# Altium PCB CM5IO.PcbDoc (part 4 of 4)
Units mm, origin at the board's own origin, x right, y up, seen from the top; angles counter-clockwise.
Board outline 160 x 90 mm, 4 copper layers (F.Cu, In1.Cu, In2.Cu, B.Cu); 76 components, 212 nets, 672 pads, 703 vias.
Unrouted connection lines stored in the file: 4.
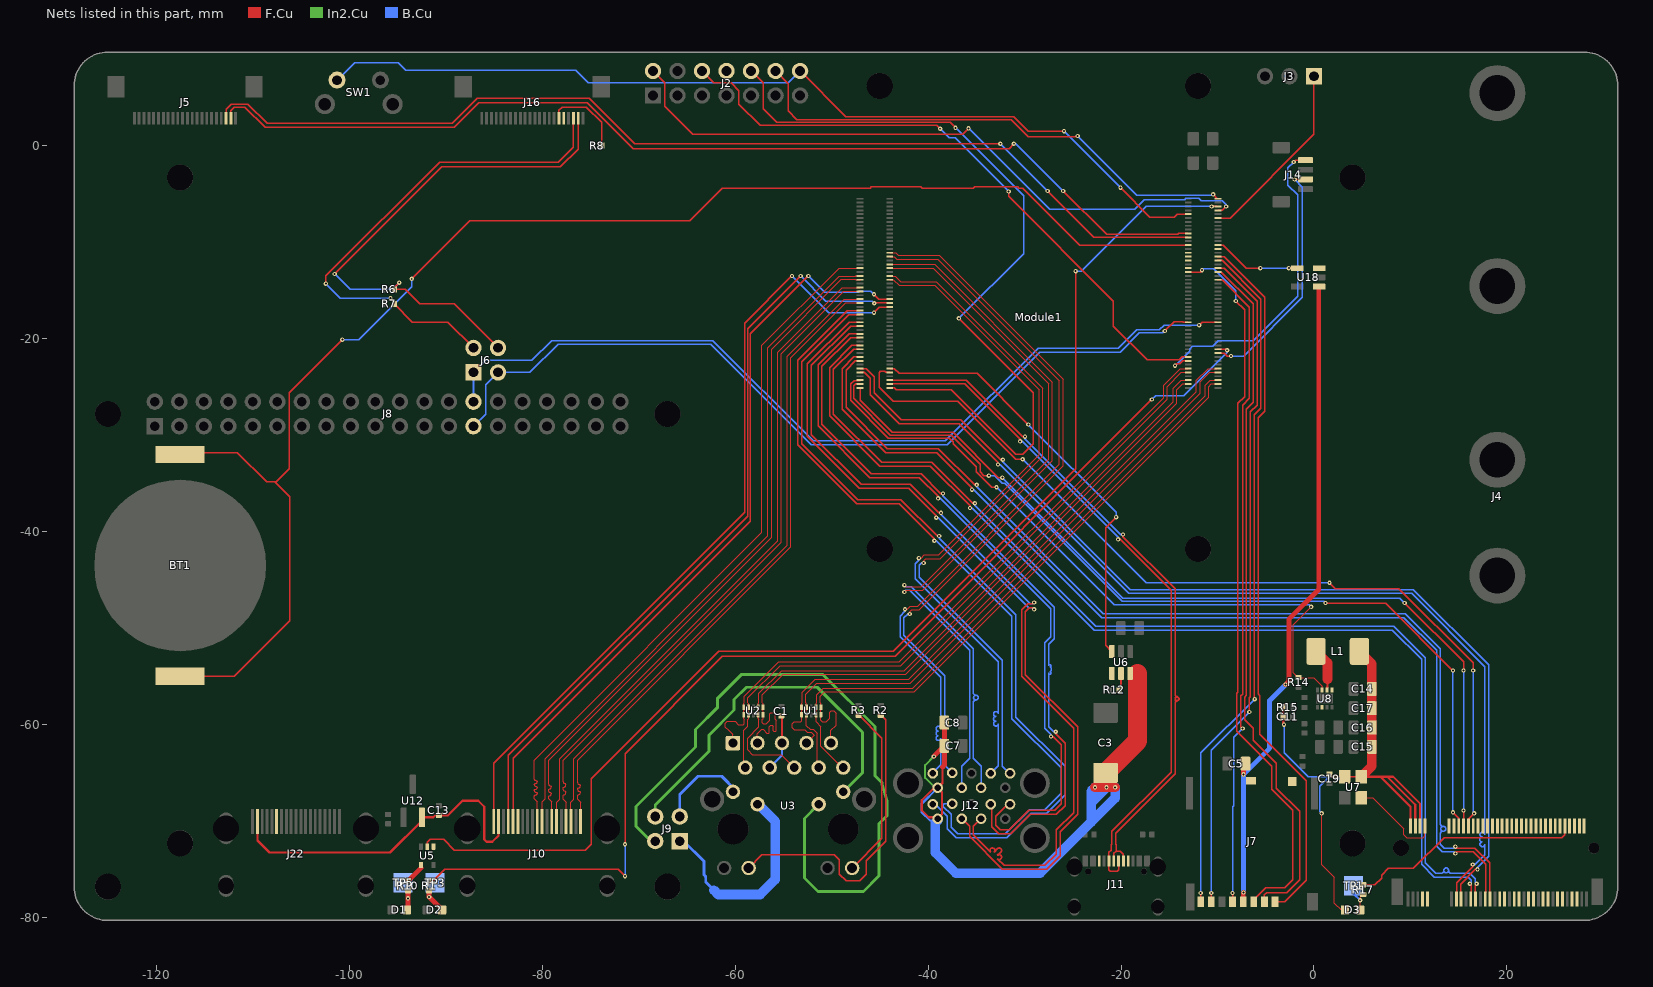
[diagram p5: the nets of this part, all layers, seen from the top]

## Via types
v1: diameter 0.45, hole 0.2, F.Cu to B.Cu, tented both sides, 703 vias

## Nets (pads, with @x,y where several pads share a name; then routed paths per layer and width w, separated by ;. In a path a pad name is that pad's centre, name@x,y a point inside that pad or via, vN(x,y) a via of type N, cw(c..) or ccw(c..) an arc to the next point about the centre after c; other vN are vias at no path point) (continued)
HDMI1_CK_P: J10.10 Module1.164 | length 73.9
  F.Cu w0.127: J10.10@-80.5,-70.02 -80.5,-68.01 -80.81,-67.7 -80.81,-67.44 -80.806,-67.407 -80.795,-67.375 -80.777,-67.346 -80.754,-67.323 -80.725,-67.305 -80.693,-67.294 -80.66,-67.29 -80.643,-67.29 -80.61,-67.286 -80.578,-67.275 -80.55,-67.257 -80.526,-67.234 -80.508,-67.205 -80.497,-67.173 -80.493,-67.14 -80.497,-67.107 -80.508,-67.075 -80.526,-67.046 -80.55,-67.023 -80.578,-67.005 -80.61,-66.994 -80.643,-66.99 -80.66,-66.99 -80.693,-66.986 -80.725,-66.975 -80.754,-66.957 -80.777,-66.934 -80.795,-66.905 -80.806,-66.873 -80.81,-66.84 -80.806,-66.807 -80.795,-66.775 -80.777,-66.746 -80.754,-66.723 -80.725,-66.705 -80.693,-66.694 -80.66,-66.69 -80.643,-66.69 -80.61,-66.686 -80.578,-66.675 -80.55,-66.657 -80.526,-66.634 -80.508,-66.605 -80.497,-66.573 -80.493,-66.54 -80.497,-66.507 -80.508,-66.475 -80.526,-66.446 -80.55,-66.423 -80.578,-66.405 -80.61,-66.394 -80.643,-66.39 -80.66,-66.39 -80.693,-66.386 -80.725,-66.375 -80.754,-66.357 -80.777,-66.334 -80.795,-66.305 -80.806,-66.273 -80.81,-66.24 -80.806,-66.207 -80.795,-66.175 -80.777,-66.146 -80.754,-66.123 -80.725,-66.105 -80.693,-66.094 -80.66,-66.09 -80.643,-66.09 -80.61,-66.086 -80.578,-66.075 -80.55,-66.057 -80.526,-66.034 -80.508,-66.005 -80.497,-65.973 -80.493,-65.94 -80.497,-65.907 -80.508,-65.875 -80.526,-65.846 -80.55,-65.823 -80.578,-65.805 -80.61,-65.794 -80.643,-65.79 -80.66,-65.79 -80.693,-65.786 -80.725,-65.775 -80.754,-65.757 -80.777,-65.734 -80.795,-65.705 -80.806,-65.673 -80.81,-65.64 -80.81,-63.679 -57.21,-40.079 -57.21,-20.679 -49.211,-12.68 -47.5,-12.68 -47.48,-12.7 Module1.164@-47,-12.7
HDMI1_D0_N: J10.9 Module1.160 | length 71.5
  F.Cu w0.127: J10.9@-80,-70.02 -80,-68.01 -79.69,-67.7 -79.69,-63.521 -56.59,-40.421 -56.59,-20.921 -49.189,-13.52 -47.5,-13.52 -47.48,-13.5 Module1.160@-47,-13.5
HDMI1_D0_P: J10.7 Module1.158 | length 71.4
  F.Cu w0.127: J10.7@-79,-70.02 -79,-68.01 -79.31,-67.7 -79.31,-67.49 -79.307,-67.462 -79.298,-67.436 -79.283,-67.412 -79.263,-67.392 -79.239,-67.377 -79.213,-67.368 -79.157,-67.362 -79.131,-67.353 -79.107,-67.338 -79.087,-67.318 -79.072,-67.294 -79.063,-67.268 -79.06,-67.24 -79.06,-67.14 -79.063,-67.112 -79.072,-67.086 -79.087,-67.062 -79.107,-67.042 -79.131,-67.027 -79.157,-67.018 -79.213,-67.012 -79.239,-67.003 -79.263,-66.988 -79.283,-66.968 -79.298,-66.944 -79.307,-66.918 -79.31,-66.89 -79.31,-66.79 -79.307,-66.762 -79.298,-66.736 -79.283,-66.712 -79.263,-66.692 -79.239,-66.677 -79.213,-66.668 -79.157,-66.662 -79.131,-66.653 -79.107,-66.638 -79.087,-66.618 -79.072,-66.594 -79.063,-66.568 -79.06,-66.54 -79.06,-66.44 -79.063,-66.412 -79.072,-66.386 -79.087,-66.362 -79.107,-66.342 -79.131,-66.327 -79.157,-66.318 -79.213,-66.312 -79.239,-66.303 -79.263,-66.288 -79.283,-66.268 -79.298,-66.244 -79.307,-66.218 -79.31,-66.19 -79.31,-63.679 -56.21,-40.579 -56.21,-21.079 -48.991,-13.86 -47.52,-13.86 -47.48,-13.9 Module1.158@-47,-13.9
HDMI1_D1_N: J10.6 Module1.154 | length 69.5
  F.Cu w0.127: J10.6@-78.5,-70.02 -78.5,-68.07 -78.19,-67.76 -78.19,-63.521 -55.59,-40.921 -55.59,-21.421 -48.909,-14.74 -47.589,-14.74 -47.549,-14.7 Module1.154@-47,-14.7
HDMI1_D1_P: J10.4 Module1.152 | length 69.4
  F.Cu w0.127: J10.4@-77.5,-70.02 -77.5,-68.07 -77.81,-67.76 -77.81,-67.39 -77.807,-67.362 -77.798,-67.336 -77.783,-67.312 -77.763,-67.292 -77.739,-67.277 -77.713,-67.268 -77.657,-67.262 -77.631,-67.253 -77.607,-67.238 -77.587,-67.218 -77.572,-67.194 -77.563,-67.168 -77.56,-67.14 -77.56,-66.99 -77.563,-66.962 -77.572,-66.936 -77.587,-66.912 -77.607,-66.892 -77.631,-66.877 -77.657,-66.868 -77.713,-66.862 -77.739,-66.853 -77.763,-66.838 -77.783,-66.818 -77.798,-66.794 -77.807,-66.768 -77.81,-66.74 -77.81,-66.59 -77.807,-66.562 -77.798,-66.536 -77.783,-66.512 -77.763,-66.492 -77.739,-66.477 -77.713,-66.468 -77.657,-66.462 -77.631,-66.453 -77.607,-66.438 -77.587,-66.418 -77.572,-66.394 -77.563,-66.368 -77.56,-66.34 -77.56,-66.19 -77.563,-66.162 -77.572,-66.136 -77.587,-66.112 -77.607,-66.092 -77.631,-66.077 -77.657,-66.068 -77.713,-66.062 -77.739,-66.053 -77.763,-66.038 -77.783,-66.018 -77.798,-65.994 -77.807,-65.968 -77.81,-65.94 -77.81,-63.679 -55.21,-41.079 -55.21,-21.579 -48.721,-15.09 -47.535,-15.09 -47.525,-15.1 Module1.152@-47,-15.1
HDMI1_D2_N: J10.3 Module1.148 | length 67.5
  F.Cu w0.127: J10.3@-77,-70.02 -77,-68.07 -76.69,-67.76 -76.69,-63.521 -54.59,-41.421 -54.59,-21.821 -48.679,-15.91 -47.535,-15.91 -47.525,-15.9 Module1.148@-47,-15.9
HDMI1_D2_P: J10.1 Module1.146 | length 67.5
  F.Cu w0.127: J10.1@-76,-70.02 -76,-68.07 -76.31,-67.76 -76.31,-67.39 -76.306,-67.358 -76.296,-67.327 -76.278,-67.3 -76.256,-67.277 -76.228,-67.26 -76.198,-67.249 -76.133,-67.242 -76.103,-67.231 -76.075,-67.214 -76.052,-67.191 -76.035,-67.164 -76.024,-67.133 -76.021,-67.101 -76.021,-67.04 -76.024,-67.008 -76.035,-66.977 -76.052,-66.95 -76.075,-66.927 -76.103,-66.91 -76.133,-66.899 -76.198,-66.892 -76.228,-66.881 -76.256,-66.864 -76.278,-66.841 -76.296,-66.814 -76.306,-66.783 -76.31,-66.751 -76.31,-66.69 -76.306,-66.658 -76.296,-66.627 -76.278,-66.6 -76.256,-66.577 -76.228,-66.56 -76.198,-66.549 -76.133,-66.542 -76.103,-66.531 -76.075,-66.514 -76.052,-66.491 -76.035,-66.464 -76.024,-66.433 -76.021,-66.401 -76.021,-66.34 -76.024,-66.308 -76.035,-66.277 -76.052,-66.25 -76.075,-66.227 -76.103,-66.21 -76.133,-66.199 -76.198,-66.192 -76.228,-66.181 -76.256,-66.164 -76.278,-66.141 -76.296,-66.114 -76.306,-66.083 -76.31,-66.051 -76.31,-63.679 -54.21,-41.579 -54.21,-21.979 -48.531,-16.3 Module1.146@-47,-16.3
HDMI1_HOTPLUG: J10.19 Module1.143 | length 81.3
  F.Cu w0.13: J10.19@-85,-70.02 -85,-64 -59,-38 -59,-18.4 v1(-54.1,-13.5) ; v1(-45.6,-17.3) -45.049,-16.749 Module1.143@-43.969,-16.749
  B.Cu w0.13: v1(-54.1,-13.5) -50.3,-17.3 v1(-45.6,-17.3)
HDMI1_SCL: J10.15 Module1.147 | length 78.8
  F.Cu w0.13: J10.15@-83,-70.02 -83,-63.5 -58.4,-38.9 -58.4,-19.5 v1(-52.4,-13.5) ; v1(-45.603,-15.403) -45.105,-15.9 Module1.147@-43.92,-15.9
  B.Cu w0.13: v1(-52.4,-13.5) -50.7,-15.2 -47.232,-15.2 -47.112,-15.08 -45.925,-15.08 v1(-45.603,-15.403)
HDMI1_SDA: J10.16 Module1.145 | length 79.5
  F.Cu w0.13: J10.16@-83.5,-70.02 -83.5,-63.2 -58.7,-38.4 -58.7,-19 v1(-53.2,-13.5) ; v1(-45.571,-16.329) -45.541,-16.3 Module1.145@-43.92,-16.3
  B.Cu w0.13: v1(-53.2,-13.5) -50.6,-16.1 -45.8,-16.1 v1(-45.571,-16.329)
HDMI_5v: C13.1 J10.18 J22.18 U12.2 | length 33.3
  F.Cu w0.23: J22.18@-109.5,-71 -109.5,-72 -108.25,-73.25 -95.75,-73.25 U12.2@-92.45,-69.95 ; U12.2@-92.41,-69.61 -91.275,-69.61 -91.05,-69.385 -89.738,-69.385 -88.253,-67.9 -86.6,-67.9 -86,-68.5 -86,-71.9 -85.75,-72.15 -85.15,-72.15 -84.5,-71.5 J10.18@-84.5,-70.8
ID_SC: J6.1 J8.28 Module1.35 | length 94
  F.Cu w0.13: v1(-11.9,-18.6) -11.6,-18.3 Module1.35@-10,-18.3
  B.Cu w0.13: J8.28@-87.11,-26.53 -87.11,-23.51 J6.1@-87.1,-23.5 ; J8.28@-87.1,-26.57 J6.1@-87.1,-23.5 ; v1(-11.9,-18.6) -15.541,-18.6 -16.015,-19.074 -18.374,-19.074 -20.3,-21 -28.6,-21 -38.2,-30.6 -51.9,-30.6 -62.3,-20.2 -79,-20.2 -81.06,-22.26 -85.86,-22.26 J6.1@-87.1,-23.5
ID_SD: J6.3 J8.27 Module1.36 | length 88.9
  F.Cu w0.13: v1(-15.453,-19.205) -14.502,-18.254 -13.611,-18.254 -13.565,-18.3 Module1.36@-13.08,-18.3
  B.Cu w0.13: J8.27@-87.11,-29.07 -85.85,-27.81 -85.85,-24.79 J6.3@-84.56,-23.5 -81.263,-23.5 -78.343,-20.58 -62.52,-20.58 -52.1,-31 -38,-31 -28.4,-21.4 -20.1,-21.4 -18.104,-19.404 -15.652,-19.404 v1(-15.453,-19.205)
M2_3v3: C11.1 C14.1 C15.1 C16.1 C17.1 C19.1 D3.2 J4.2 J4.4 J4.12 J4.14 J4.16 J4.18 J4.70 J4.72 J4.74 L1.2 R15.1 U7.1 U7.4 | length 70.4
  F.Cu w0.127: v1(0.8,-69.2) 0.8,-74.5 2.1,-75.8 2.1,-78.5 2.8,-79.2 D3.2@3.213,-79.2
  F.Cu w0.13: C19.1@1.6,-65.14 1.86,-65.4 v1(2.3,-65.4) U7.1@3.2,-65.4 U7.4@4.9,-65.4 8.2,-65.4
  F.Cu w0.23: R15.1@-3.185,-58.2 -3.185,-59.2 -3.185,-59.915 v1(-3.1,-60) ; U7.4@4.9,-65.4 6.9,-65.4 ; J4.74@10,-70.525 10,-68.5 6.9,-65.4 ; J4.72@10.5,-70.525 10.5,-68.3 7.6,-65.4 ; J4.70@11,-70.525 11,-68.2 8.2,-65.4 7.6,-65.4 ; 6.9,-65.4 7.6,-65.4
  F.Cu w1: L1.2@4.7,-52.4 6,-53.7 6,-54.1 C15.1@6,-62.3 6,-64.3 U7.4@4.9,-65.4
  B.Cu w0.13: v1(-3.1,-60) -3.1,-62.9 -0.6,-65.4 v1(2.3,-65.4) 1.6,-65.4 0.6,-66.4 0.6,-69 v1(0.8,-69.2)
Net-(C1-Pad1): C1.1 U3.4 U3.5 | length 5.8
  F.Cu w0.23: U3.5@-55.135,-61.91 C1.1@-55.135,-59.145
  B.Cu w0.23: U3.4@-56.405,-64.45 -55.135,-63.18 U3.5@-55.135,-61.91
Net-(D1-K): D1.1 R10.1 TP5.1 | length 3
  F.Cu w0.5: D1.1@-93.9,-79.087 v1(-93.9,-78) R10.1@-93.9,-77.185
  B.Cu w0.23: v1(-93.9,-78) TP5.1@-93.9,-76.9
Net-(D2-K): D2.1 R1.1 TP3.1 | length 3.4
  F.Cu w0.5: R1.1@-91.7,-77.185 v1(-91.7,-77.862) D2.1@-90.362,-79.2
  B.Cu w0.23: v1(-91.7,-77.862) TP3.1@-91.7,-77.012
Net-(D3-K): D3.1 R17.1 TP1.1 | length 2.7
  F.Cu w0.127: D3.1@4.788,-79.2 4.788,-77.897 R17.1@5.1,-77.585
  B.Cu w0.23: TP1.1@4.1,-77.512 v1(4.788,-78.2)
Net-(J4-DAS{slash}{\D\S\S\}\{\s\l\a\s\h\}\{LED1}): J4.10 R17.2 | length 24.1
  F.Cu w0.13: R17.2@5.1,-76.615 6.285,-76.615 7,-75.9 7,-75.6 7.7,-74.9 10.3,-74.9 13.5,-71.7 25.7,-71.7 26,-71.4 J4.10@26,-70.525
Net-(J4-SUSCLK): J4.68 U7.3 | length 9.7
  F.Cu w0.127: U7.3@4.9,-67.6 6.1,-67.6 9.3,-70.8 9.3,-71.4 9.6,-71.7 11.3,-71.7 11.5,-71.5 J4.68@11.5,-70.525
Net-(J16-Pin_17): J16.17 R8.2 | length 8.5
  F.Cu w0.13: J16.17@-78.25,2.85 -78.25,3.65 -77.9,4 -75.4,4 -73.8,2.4 R8.2@-73.8,0
Net-(Module1A-LED_nACT): Module1.21 R1.2 | length 114.7
  F.Cu w0.13: R1.2@-91.7,-76.215 -91.315,-76.215 -90.1,-75 -72.1,-75 v1(-71.4,-75.7) ; v1(-71.4,-72.4) -71.4,-63 -61.3,-52.9 -43.4,-52.9 v1(-16.8,-26.3) ; Module1.21@-10,-21.1 -9.1,-21.1 v1(-9,-21.2)
  B.Cu w0.13: v1(-71.4,-75.7) v1(-71.4,-72.4) ; v1(-16.8,-26.3) -16.4,-25.9 -13.5,-25.9 -9,-21.4 v1(-9,-21.2)
Net-(R10-Pad2): R10.2 U5.4 | length 2.2
  F.Cu w0.23: U5.4@-92.55,-74.865 U5.4@-92.55,-74.55
  F.Cu w0.5: R10.2@-93.9,-76.215 U5.4@-92.55,-74.865
Net-(U3-LEDG_K): R3.1 U3.18 | length 18.1
  F.Cu w0.13: U3.18@-47.87,-74.86 -44.8,-71.79 -44.8,-61.4 R3.1@-47.2,-59
Net-(U3-LEDY_K): R2.1 U3.16 | length 32.6
  F.Cu w0.13: U3.16@-58.59,-74.86 -57.23,-73.5 -49.7,-73.5 -49.2,-74 -49.2,-75.5 -48.5,-76.2 -47.1,-76.2 -46.4,-75.5 -46.4,-74.1 -44.4,-72.1 -44.4,-59.5 R2.1@-44.9,-59
Net-(U6-ILIM): R12.1 U6.5 | length 3.3
  F.Cu w0.13: R12.1@-20,-56.185 U6.5@-20,-54.7
  F.Cu w0.23: R12.1@-20.19,-56.4 -20,-56.21 U6.5@-20,-54.7
Net-(U8-LX): L1.1 U8.6 | length 4.5
  F.Cu w0.23: U8.6@1.35,-56.4 1.35,-56.15 1.4,-56.1 1.4,-55.3
  F.Cu w1: L1.1@0.2,-52.4 1.4,-53.6 1.4,-55.3
nPWR_LED: Module1.95 U5.2 | length 126.6
  F.Cu w0.13: U5.2@-91.9,-72.65 -91.9,-72.195 -91.605,-71.9 -90.2,-71.9 -89.1,-73 -75.5,-73 -74.9,-72.4 -74.9,-65.6 -61.7,-52.4 -43.6,-52.4 -24.7,-33.5 v1(-24.7,-13) ; v1(-10.6,-6.3) Module1.95@-10,-6.3
  B.Cu w0.13: v1(-24.7,-13) -24.1,-13 -17.4,-6.3 -12.579,-6.3 -12.574,-6.305 -12.226,-6.305 -12.221,-6.3 v1(-10.6,-6.3)
nRPIBOOT: J2.2 Module1.93 | length 69.2
  F.Cu w0.13: J2.2@-68.5,7.74 -67.26,6.5 -67.26,4.06 -64.4,1.2 -36.4,1.2 v1(-35.8,1.8) ; Module1.93@-9.96,-6.7 -9.5,-6.7 v1(-9.1,-6.3)
  B.Cu w0.13: v1(-35.8,1.8) -27.4,-6.6 -18.6,-6.6 -17.6,-5.6 -13.4,-5.6 -13.265,-5.465 -11.935,-5.465 -11.7,-5.7 -9.5,-5.7 -9.1,-6.1 v1(-9.1,-6.3)
PCIE_CLK_N: J4.53 Module1.112 | length 103.8
  F.Cu w0.147: Module1.112@-47,-23.1 -46.425,-23.1 -45.575,-23.95 -45.575,-25.625 -42.8,-28.4 -36.617,-28.4 -32.466,-32.551 v1(-32.251,-32.551) ; J4.53@15.2,-77.4 15.2,-76.533 16.734,-74.999 v1(16.949,-74.999)
  B.Cu w0.147: v1(-32.251,-32.551) -32.251,-32.766 -19.017,-46 10.283,-46 18.1,-53.817 18.1,-73.633 16.949,-74.784 v1(16.949,-74.999)
PCIE_CLK_P: J4.55 Module1.110 | length 105.4
  F.Cu w0.147: Module1.110@-47,-23.5 -46.6,-23.5 -45.975,-24.125 -45.975,-25.825 -43,-28.8 -36.783,-28.8 -32.749,-32.834 v1(-32.749,-33.049) ; J4.55@14.8,-77.4 14.8,-76.367 16.451,-74.716 v1(16.451,-74.501)
  B.Cu w0.147: v1(-32.749,-33.049) -32.534,-33.049 -19.183,-46.4 10.117,-46.4 17.7,-53.983 17.7,-71.4 ccw(c17.45,-71.4) 17.45,-71.65 17.411,-71.65 ccw(c17.411,-71.9) 17.161,-71.9 ccw(c17.411,-71.9) 17.411,-72.15 17.45,-72.15 ccw(c17.45,-72.4) 17.7,-72.4 17.7,-73.467 16.666,-74.501 v1(16.451,-74.501)
PCIE_nCLKREQ: J4.52 Module1.102 | length 92.1
  F.Cu w0.13: Module1.102@-47,-25.1 -47,-26.4 -43.7,-29.7 -37.4,-29.7 -32.7,-34.4 v1(-32.3,-34.4) ; v1(9.4,-47.4) 15.5,-53.5 v1(15.5,-54.4) ; J4.52@15.5,-70.525 v1(15.5,-68.9)
  B.Cu w0.13: v1(-32.3,-34.4) -19.8,-46.9 8.9,-46.9 v1(9.4,-47.4) ; v1(15.5,-68.9) v1(15.5,-54.4)
PCIE_nRST: J4.50 Module1.109 | length 93.4
  F.Cu w0.13: v1(1.6,-45.3) 2.2,-45.9 8.8,-45.9 16.5,-53.6 v1(16.5,-54.4) ; J4.50@16,-70.525 16,-69.8 v1(16.6,-69.2)
  F.Cu w0.147: Module1.109@-43.92,-23.5 -44.375,-23.5 -44.475,-23.4 -44.925,-23.4 -45.075,-23.55 -45.075,-25.025 -43.6,-26.5 -36.9,-26.5 -30.9,-32.5 v1(-30.2,-32.5)
  B.Cu w0.13: -2,-45.3 v1(1.6,-45.3) ; v1(16.5,-54.4) 16.5,-67.9 16.515,-67.915 16.515,-69.115 v1(16.6,-69.2)
  B.Cu w0.147: v1(-30.2,-32.5) -17.4,-45.3 -2,-45.3
PCIE_nWAKE: J4.54 Module1.104 | length 92.7
  F.Cu w0.13: Module1.104@-47.04,-24.7 -47.5,-24.7 -47.7,-24.9 -47.7,-26.2 -43.9,-30 -37.6,-30 -34.6,-33 -34.6,-33.8 -34.2,-34.2 v1(-33.7,-34.2) ; v1(1.2,-47.4) 1.22,-47.42 7.42,-47.42 v1(14.4,-54.4) ; v1(14.4,-69.1) 15,-69.7 J4.54@15,-70.525
  B.Cu w0.13: v1(-33.7,-34.2) -33.1,-34.2 -32.3,-35 -32.061,-35 -19.861,-47.2 1,-47.2 v1(1.2,-47.4) ; v1(14.4,-69.1) v1(14.4,-54.4)
PCIE_PWR_EN: Module1.106 R14.1 U8.7 | length 71.3
  F.Cu w0.127: R14.1@-1.67,-55.13 -2.156,-54.644 -2.156,-49.656 v1(-0.3,-47.8) ; R14.1@-1.6,-55.13 -0.043,-55.13 0.85,-56.023 U8.7@0.85,-56.4
  F.Cu w0.13: Module1.106@-47.04,-24.3 -47.085,-24.345 -47.645,-24.345 -48,-24.7 -48,-26.4 -44.1,-30.3 -37.8,-30.3 -37.4,-30.7 -37.4,-30.9 -35,-33.3 -35,-33.8 -33.4,-35.4 v1(-32.9,-35.4)
  B.Cu w0.13: v1(-32.9,-35.4) -20.7,-47.6 -0.5,-47.6 v1(-0.3,-47.8)
PCIE_RX_N: J4.43 Module1.118 | length 107.9
  F.Cu w0.147: Module1.118@-47.04,-21.9 -47.683,-21.9 -48.9,-23.117 -48.9,-27.3 -44.4,-31.8 -39.089,-31.8 -35.45,-35.44 v1(-35.45,-35.654) ; v1(14.643,-73.351) 14.795,-73.2 16.517,-73.2 17.8,-74.483 J4.43@17.8,-77.4
  B.Cu w0.147: v1(-35.45,-35.654) -35.236,-35.654 -21.989,-48.9 9.317,-48.9 12.7,-52.283 12.7,-72.583 13.317,-73.2 14.492,-73.2 v1(14.643,-73.351)
PCIE_RX_P: J4.41 Module1.116 | length 109.4
  F.Cu w0.147: Module1.116@-47.04,-22.3 -47.517,-22.3 -48.5,-23.283 -48.5,-27.1 -44.2,-31.4 -38.924,-31.4 -35.167,-35.157 v1(-34.953,-35.157) ; v1(14.643,-72.648) 14.795,-72.8 16.683,-72.8 18.2,-74.317 J4.41@18.2,-77.4
  B.Cu w0.147: v1(-34.953,-35.157) -34.953,-35.371 -21.824,-48.5 9.483,-48.5 13.1,-52.117 13.1,-70.3 ccw(c13.35,-70.3) 13.35,-70.55 13.396,-70.55 ccw(c13.396,-70.8) 13.646,-70.8 ccw(c13.396,-70.8) 13.396,-71.05 13.35,-71.05 ccw(c13.35,-71.3) 13.1,-71.3 13.1,-72.417 13.483,-72.8 14.492,-72.8 v1(14.643,-72.648)
PCIE_TX_N: J4.49 Module1.124 | length 109.5
  F.Cu w0.147: Module1.124@-47.04,-20.7 -47.883,-20.7 -50.2,-23.017 -50.2,-27.983 -44.983,-33.2 -39.788,-33.2 -35.649,-37.339 v1(-35.649,-37.554) ; v1(16.149,-76.493) 16.3,-76.644 J4.49@16.3,-77.4
  B.Cu w0.147: v1(-35.649,-37.554) -35.435,-37.554 -22.788,-50.2 8.117,-50.2 11.15,-53.233 11.15,-74.483 12.467,-75.8 15.967,-75.8 16.3,-76.133 16.3,-76.341 v1(16.149,-76.493)
PCIE_TX_P: J4.47 Module1.122 | length 111.1
  F.Cu w0.147: Module1.122@-47.04,-21.1 -47.717,-21.1 -49.8,-23.183 -49.8,-27.817 -44.817,-32.8 -39.623,-32.8 -35.366,-37.056 v1(-35.152,-37.056) ; J4.47@16.7,-77.4 16.7,-76.644 v1(16.852,-76.493)
  B.Cu w0.147: v1(-35.152,-37.056) -35.152,-37.271 -22.623,-49.8 8.283,-49.8 11.55,-53.067 11.55,-74.317 12.633,-75.4 12.65,-75.4 13.2,-75.4 ccw(c13.2,-75.15) 13.45,-75.15 13.45,-75.104 ccw(c13.7,-75.104) 13.7,-74.854 ccw(c13.7,-75.104) 13.95,-75.104 13.95,-75.15 ccw(c14.2,-75.15) 14.2,-75.4 16.133,-75.4 16.7,-75.967 16.7,-76.341 v1(16.852,-76.493)
PMIC_ENABLE: J2.12 Module1.99 | length 53.1
  F.Cu w0.13: J2.12@-55.8,7.74 -54.5,6.44 -54.5,3.6 -53.6,2.7 -31.4,2.7 -29.6,0.9 -24.6,0.9 v1(-24.5,1) ; v1(-10.45,-5.05) Module1.99@-10,-5.5
  B.Cu w0.13: v1(-24.5,1) -18.38,-5.12 -10.52,-5.12 v1(-10.45,-5.05)
PWM: J14.2 Module1.19 | length 25.1
  F.Cu w0.13: Module1.19@-9.96,-21.5 -9.294,-21.5 -8.994,-21.8 v1(-8.6,-21.8) ; v1(-2,-3.5) J14.2@-0.875,-3.5
  B.Cu w0.13: v1(-8.6,-21.8) -7.3,-21.8 -1.2,-15.7 -1.2,-4.3 v1(-2,-3.5)
PWR_BUT: J2.14 Module1.92 SW1.1 | length 96.7
  F.Cu w0.13: J2.14@-53.26,7.74 -48.52,3 -31.1,3 -29.6,1.5 v1(-25.9,1.5) ; v1(-20.05,-4.35) -17,-7.4 -14.47,-7.4 -14.17,-7.1 Module1.92@-13.08,-7.1
  B.Cu w0.13: SW1.1@-101.25,6.8 -101.2,6.8 -99.4,8.6 -94.9,8.6 -94.1,7.8 -76.5,7.8 -75.2,6.5 -54.5,6.5 J2.14@-53.26,7.74 ; v1(-25.9,1.5) v1(-20.05,-4.35)
SCL0: J5.20 Module1.80 | length 108.7
  F.Cu w0.13: J5.20@-112.75,2.85 -112.75,3.75 -112.2,4.3 -110.5,4.3 -108.5,2.3 -89.3,2.3 -86.7,4.9 -75.1,4.9 -70.4,0.2 v1(-32.5,0.2) ; v1(-27.6,-4.7) -22.8,-9.5 Module1.80@-13.08,-9.5
  B.Cu w0.13: v1(-32.5,0.2) v1(-27.6,-4.7)
SCL1: J6.2 J16.20 R7.2 | length 52.9
  F.Cu w0.13: v1(-102.4,-14.3) -102.4,-13.5 -90.6,-1.7 -78.3,-1.7 -76.75,-0.15 J16.20@-76.75,2.85 ; v1(-95.7,-15.8) R7.2@-95.33,-16.17 ; R7.2@-95.33,-16.4 -93.43,-18.3 -89.76,-18.3 J6.2@-87.1,-20.96
  B.Cu w0.13: v1(-102.4,-14.3) -100.9,-15.8 v1(-95.7,-15.8)
SD_CLK: J7.5 Module1.57 | length 67
  F.Cu w0.13: Module1.57@-10,-13.9 -9.53,-13.9 -6.7,-16.73 -6.7,-26.2 -7.4,-26.9 -7.4,-56.845 -7.58,-57.025 -7.58,-60.22 v1(-7.4,-60.4) ; v1(-8.45,-77.45) -8.44,-77.46 J7.5@-8.44,-78.375
  B.Cu w0.13: v1(-8.45,-77.45) -8.4,-77.4 -8.4,-68.5 -8.3,-68.4 -8.3,-61.3 v1(-7.4,-60.4)
SD_CMD: J7.3 Module1.62 | length 75.2
  F.Cu w0.13: Module1.62@-13.08,-13.1 -11.8,-13.1 v1(-11.6,-12.9) ; v1(-8.1,-16.1) -7.2,-17 -7.2,-26 -7.9,-26.7 -7.9,-56.65 -8,-56.75 -8,-60.7 -4.4,-64.3 -4.4,-66.7 -2.2,-68.9 -2.2,-76.1 -3.017,-76.917 -4.982,-76.917 J7.3@-6.24,-78.175
  B.Cu w0.13: v1(-11.6,-12.9) -11.44,-12.74 -10.392,-12.74 -8.1,-15.032 v1(-8.1,-16.1)
SD_DAT0: J7.7 Module1.63 | length 69.8
  F.Cu w0.13: v1(-10.65,-77.45) -10.64,-77.46 J7.7@-10.64,-78.375 ; Module1.63@-10,-12.7 -9.3,-12.7 -5.9,-16.1 -5.9,-26.9 -6.6,-27.6 -6.6,-57.1 -6.7,-57.2 v1(-6.7,-58.694)
  B.Cu w0.13: v1(-10.65,-77.45) -10.65,-62.65 -6.7,-58.7 v1(-6.7,-58.694)
SD_DAT1: J7.8 Module1.67 | length 71.3
  F.Cu w0.13: J7.8@-11.74,-78.375 v1(-11.74,-77.45) ; Module1.67@-10,-11.9 -9.5,-11.9 -5.5,-15.9 -5.5,-27.2 -6.2,-27.9 -6.2,-57.3 v1(-6.14,-57.36)
  B.Cu w0.13: v1(-11.74,-77.45) -11.74,-62.94 -6.16,-57.36 v1(-6.14,-57.36)
SD_DAT2: J7.1 Module1.69 | length 73.6
  F.Cu w0.13: Module1.69@-10,-11.5 -9.3,-11.5 -5.1,-15.7 -5.1,-27.5 -5.8,-28.2 -5.8,-56.8 -5.6,-57 -5.6,-61 -0.8,-65.8 -0.8,-76.15 -3.025,-78.375 J7.1@-4.04,-78.375
SD_DAT3: J7.2 Module1.61 | length 72.5
  F.Cu w0.13: Module1.61@-10,-13.1 -9.6,-13.1 -6.3,-16.4 -6.3,-26.6 -7,-27.3 -7,-56.979 -7.2,-57.179 -7.2,-59.5 -6.3,-60.4 -6.3,-61.6 -3.9,-64 -3.9,-66.6 -1.5,-69 -1.5,-76.1 -2.8,-77.4 -4.9,-77.4 -5.14,-77.64 J7.2@-5.14,-78.375
SD_PWR: C5.1 J7.4 U18.1 | length 67.9
  F.Cu w0.5: J7.4@-7.34,-78.375 -7.34,-77.44 v1(-7.3,-77.4) ; v1(-7.3,-65.15) C5.1@-7.3,-64.237 ; v1(-2.95,-55.85) -2.6,-55.5 -2.6,-49.1 0.5,-46 U18.1@0.5,-14.6
  B.Cu w0.5: v1(-7.3,-77.4) v1(-7.3,-65.15) -4.6,-62.45 -4.6,-57.5 v1(-2.95,-55.85)
SD_PWR_ON: Module1.75 U18.4 | length 9.3
  F.Cu w0.13: Module1.75@-10,-10.3 -9.4,-10.3 -7,-12.7 v1(-5.555,-12.7) ; v1(-2.6,-12.7) U18.4@-1.7,-12.7
  B.Cu w0.13: v1(-5.555,-12.7) v1(-2.6,-12.7)
SDA0: J5.21 Module1.82 | length 108.1
  F.Cu w0.13: J5.21@-112.25,2.85 -112.25,3.63 -111.88,4 -110.8,4 -108.7,1.9 -89.1,1.9 -86.54,4.46 -75.316,4.46 -70.556,-0.3 -31.6,-0.3 v1(-31.1,0.2) ; v1(-26,-4.7) -21.5,-9.2 -20.5,-9.2 -20.495,-9.195 -14.112,-9.195 -14.017,-9.1 Module1.82@-13.08,-9.1
  B.Cu w0.13: v1(-31.1,0.2) -30.9,0.2 v1(-26,-4.7)
SDA1: J6.4 J16.21 R6.2 | length 55.5
  F.Cu w0.13: v1(-101.5,-13.3) -90.4,-2.2 -78.1,-2.2 -76.25,-0.35 J16.21@-76.25,2.85 ; R6.2@-95.33,-14.9 -94.2,-14.9 -92.7,-16.4 -89.12,-16.4 J6.4@-84.56,-20.96 ; R6.2@-95.33,-14.73 v1(-94.8,-14.2)
  B.Cu w0.13: v1(-101.5,-13.3) -99.9,-14.9 -95.5,-14.9 v1(-94.8,-14.2)
SYNC_OUT: J2.6 Module1.18 | length 65.5
  F.Cu w0.13: J2.6@-63.42,7.74 -62.18,6.5 -60.4,6.5 -59.6,5.7 -59.6,4.3 -57.4,2.1 -39.1,2.1 v1(-38.75,1.75) ; v1(-31.65,-4.75) -31.65,-5.25 -20.8,-16.1 -20.8,-18.7 -17.3,-22.2 -13.974,-22.2 -13.674,-21.9 Module1.18@-13.08,-21.9
  B.Cu w0.13: v1(-38.75,1.75) -37.8,0.8 -37.2,0.8 v1(-31.65,-4.75)
TACHO: J14.4 Module1.16 | length 33.2
  F.Cu w0.13: v1(-14.4,-22.8) -14.2,-22.6 -13.907,-22.6 -13.607,-22.3 Module1.16@-13.08,-22.3 ; v1(-2.1,-1.7) -1.9,-1.5 J14.4@-0.875,-1.5
  B.Cu w0.13: v1(-14.4,-22.8) -12.9,-21.3 -12.9,-21.1 -12.6,-20.8 -10.5,-20.8 -9.9,-20.2 -6.3,-20.2 -1.7,-15.6 -1.7,-5.1 -2.7,-4.1 -2.7,-2.3 v1(-2.1,-1.7)
TR0_TAP: J9.3 U3.11 | length 9.4
  B.Cu w0.3: J9.3@-65.73,-69.53 -65.73,-67.23 -63.85,-65.35 -61.381,-65.35 U3.11@-59.988,-66.743
TR1_TAP: J9.1 U3.12 | length 22.3
  B.Cu w0.3: J9.1@-65.73,-72.07 -65.33,-72.07 -63.2,-74.2 -63.2,-75.6 -63.03,-75.77 -63.03,-76.32 -62.2,-77.15
  B.Cu w1: -62.2,-77.15 -61.75,-77.6 -57.4,-77.6 -55.85,-76.05 -55.85,-70 U3.12@-57.45,-68.4
TR2_TAP: J9.2 U3.13 | length 72.4
  In2.Cu w0.3: J9.2@-68.27,-72.07 -68.73,-72.07 -70.27,-70.53 -70.27,-68.489 -64.1,-62.319 -64.1,-60.5 -61.8,-58.2 -61.8,-57.262 -59.363,-54.825 -50.875,-54.825 -45.5,-60.2 -45.5,-65.3 -44.77,-66.03 -44.77,-66.211 -44.225,-67.933 -44.225,-69.425 -45.1,-70.3 -45.1,-75.7 -46.7,-77.3 -51.4,-77.3 -52.8,-75.9 -52.8,-69.715 U3.13@-51.325,-68.24
TR3_TAP: J9.4 U3.14 | length 38.3
  In2.Cu w0.3: J9.4@-68.27,-69.53 -68.27,-68.328 -62.7,-62.758 -62.7,-61.1 -60.1,-58.5 -60.1,-57.4 -58.825,-56.125 -51.475,-56.125 -46.8,-60.8 -46.8,-64.985 U3.14@-48.785,-66.97
TRD0_N: Module1.10 U2.4 U2.7 U3.2 | length 67.5
  F.Cu w0.127: U3.2@-59.1,-64.295 -59.1,-60.6 -58.66,-60.16 -58.66,-59.442 -58.6,-59.382 U2.7@-58.6,-58.97 -58.6,-58.557 -58.66,-58.497 U2.4@-58.66,-58.385 ; U2.4@-58.6,-58.2 -58.6,-57.787 -58.66,-57.727 -58.66,-57.229 -55.321,-53.89 -42.821,-53.89 -15.21,-26.279 -15.21,-24.979 -13.731,-23.5 Module1.10@-13.04,-23.5
TRD0_P: Module1.12 U2.5 U2.6 U3.1 | length 68.2
  F.Cu w0.127: U3.1@-60.215,-61.91 -60.215,-61.015 -60.68,-60.55 -60.7,-60.55 -61,-60.25 -61,-59.85 -60.8,-59.65 -60,-59.65 -59.65,-60 -59.15,-60 -59.04,-59.89 -59.04,-59.84 -59.04,-59.442 -59.1,-59.382 U2.6@-59.1,-58.97 -59.1,-58.557 -59.04,-58.497 U2.5@-59.04,-58.385 ; U2.5@-59.1,-58.2 -59.1,-57.787 -59.04,-57.727 -59.04,-57.071 -55.479,-53.51 -42.979,-53.51 -15.59,-26.121 -15.59,-24.821 -13.869,-23.1 Module1.12@-13.04,-23.1
TRD1_N: Module1.6 U2.2 U2.9 U3.6 | length 70.5
  F.Cu w0.127: U2.2@-57.6,-58.2 -57.6,-57.787 -57.54,-57.727 -57.54,-56.771 -55.179,-54.41 -42.479,-54.41 -14.59,-26.521 -14.59,-25.121 -13.779,-24.31 -13.615,-24.31 -13.605,-24.3 Module1.6@-13.08,-24.3 ; U2.2@-57.54,-58.385 -57.54,-58.497 -57.6,-58.557 U2.9@-57.6,-58.97 -57.6,-59.382 -57.54,-59.442 -57.54,-60.24 -58.7,-61.4 -58.7,-62.6 -58.2,-63.1 -55.215,-63.1 U3.6@-53.865,-64.45
TRD1_P: Module1.4 U2.1 U2.10 U3.3 | length 69.7
  F.Cu w0.127: U3.3@-57.675,-61.91 -57.675,-60.925 -57.25,-60.5 -57.1,-60.5 -56.7,-60.9 -56.5,-60.9 -56.45,-60.85 -56.45,-60.2 -56.3,-60.05 -56.15,-60.05 -56.05,-60.15 -56.05,-60.65 -56,-60.7 -55.85,-60.7 -55.8,-60.7 -55.75,-60.65 -55.75,-59.55 -55.85,-59.45 -55.85,-58.85 -55.95,-58.75 -56.3,-58.75 -56.4,-58.85 -56.4,-59.55 -56.75,-59.9 -57.05,-59.9 -57.16,-59.79 -57.16,-59.442 -57.1,-59.382 U2.10@-57.1,-58.97 -57.1,-58.557 -57.16,-58.497 U2.1@-57.16,-58.385 ; U2.1@-57.1,-58.2 -57.1,-57.787 -57.16,-57.727 -57.16,-56.929 -55.021,-54.79 -42.321,-54.79 -14.21,-26.679 -14.21,-25.279 -13.621,-24.69 -13.615,-24.69 -13.605,-24.7 Module1.4@-13.08,-24.7
TRD2_N: Module1.9 U1.4 U1.7 U3.8 | length 65.1
  F.Cu w0.127: U1.4@-52.66,-58.385 -52.66,-58.497 -52.6,-58.557 U1.7@-52.6,-58.97 -52.6,-60.1 -52.2,-60.5 -51.9,-60.5 -51.5,-60.9 U3.8@-51.5,-64.275 ; U1.4@-52.6,-58.2 -52.6,-57.787 -52.66,-57.727 -52.66,-56.829 -51.521,-55.69 -41.821,-55.69 -11.81,-25.679 -11.81,-24.479 -10.821,-23.49 -10.535,-23.49 -10.525,-23.5 Module1.9@-10,-23.5
TRD2_P: Module1.11 U1.5 U1.6 U3.7 | length 65.7
  F.Cu w0.127: U1.5@-53.1,-58.2 -53.1,-57.787 -53.04,-57.727 -53.04,-56.671 -51.679,-55.31 -41.979,-55.31 -12.19,-25.521 -12.19,-24.321 -10.979,-23.11 -10.535,-23.11 -10.525,-23.1 Module1.11@-10,-23.1 ; U1.5@-53.04,-58.385 -53.04,-58.497 -53.1,-58.557 U1.6@-53.1,-58.97 -53.1,-59.6 -53.2,-59.7 -53.85,-59.7 -54.05,-59.9 -54.05,-60.35 -53.85,-60.55 -52.75,-60.55 -52.5,-60.8 -52.1,-60.8 -51.8,-61.1 -51.8,-61.115 U3.7@-52.595,-61.91
TRD3_N: Module1.5 U1.2 U1.9 U3.10 | length 64.2
  F.Cu w0.127: U1.2@-51.6,-58.2 -51.6,-57.787 -51.54,-57.727 -51.54,-56.888 -50.862,-56.21 -41.579,-56.21 -11.29,-25.921 -11.29,-24.821 -10.769,-24.3 Module1.5@-10,-24.3 ; U1.2@-51.54,-58.385 -51.54,-58.497 -51.6,-58.557 U1.9@-51.6,-58.97 -51.6,-59.7 -51.1,-60.2 -51.1,-62.264 U3.10@-48.914,-64.45
TRD3_P: Module1.3 U1.1 U1.10 U3.9 | length 63.5
  F.Cu w0.127: U1.1@-51.16,-58.385 -51.16,-58.497 -51.1,-58.557 U1.10@-51.1,-58.97 -51.1,-59.55 -50.95,-59.7 -50.55,-59.7 -50.2,-59.35 -50.2,-58.7 -50.05,-58.55 -49.75,-58.55 -49.5,-58.8 -49.5,-60.05 -50.055,-60.605 U3.9@-50.055,-61.91 ; U1.1@-51.1,-58.2 -51.1,-57.787 -51.16,-57.727 -51.16,-57.046 -50.704,-56.59 -41.421,-56.59 -10.91,-26.079 -10.91,-24.979 -10.631,-24.7 Module1.3@-10,-24.7
unconnected-(J2-Pin_8-Pad8): J2.8
unconnected-(J4-DEVSLP-Pad38): J4.38
unconnected-(J4-NC-Pad6): J4.6
unconnected-(J4-NC-Pad8): J4.8
unconnected-(J4-NC-Pad20): J4.20
unconnected-(J4-NC-Pad22): J4.22
unconnected-(J4-NC-Pad24): J4.24
unconnected-(J4-NC-Pad26): J4.26
unconnected-(J4-NC-Pad28): J4.28
unconnected-(J4-NC-Pad30): J4.30
unconnected-(J4-NC-Pad32): J4.32
unconnected-(J4-NC-Pad34): J4.34
unconnected-(J4-NC-Pad36): J4.36
unconnected-(J4-NC-Pad40): J4.40
unconnected-(J4-NC-Pad42): J4.42
unconnected-(J4-NC-Pad44): J4.44
unconnected-(J4-NC-Pad46): J4.46
unconnected-(J4-NC-Pad48): J4.48
unconnected-(J4-NC-Pad56): J4.56
unconnected-(J4-NC-Pad58): J4.58
unconnected-(J4-NC-Pad67): J4.67
unconnected-(J4-PEDET-Pad69): J4.69
unconnected-(J4-PERn1-Pad35): J4.35
unconnected-(J4-PERn2-Pad23): J4.23
unconnected-(J4-PERn3-Pad11): J4.11
unconnected-(J4-PERp1-Pad37): J4.37
unconnected-(J4-PERp2-Pad25): J4.25
unconnected-(J4-PERp3-Pad13): J4.13
unconnected-(J4-PETn1-Pad29): J4.29
unconnected-(J4-PETn2-Pad17): J4.17
unconnected-(J4-PETn3-Pad5): J4.5
unconnected-(J4-PETp1-Pad31): J4.31
unconnected-(J4-PETp2-Pad19): J4.19
unconnected-(J4-PETp3-Pad7): J4.7
unconnected-(J7-DET_A-Pad10): J7.10
unconnected-(J7-DET_B-Pad9): J7.9
unconnected-(J10-UTILITY{slash}HEAC+-Pad14): J10.14
unconnected-(J11-SBU1-PadA8): J11.A8
unconnected-(J11-SBU2-PadB8): J11.B8
unconnected-(J16-Pin_18-Pad18): J16.18
unconnected-(J22-UTILITY{slash}HEAC+-Pad14): J22.14
unconnected-(Module1A-SD_DAT4-Pad68): Module1.68
unconnected-(Module1A-SD_DAT5-Pad64): Module1.64
unconnected-(Module1A-SD_DAT6-Pad72): Module1.72
unconnected-(Module1A-SD_DAT7-Pad70): Module1.70
unconnected-(Module1A-SD_VDD_Override-Pad73): Module1.73
unconnected-(U5-nc-Pad1): U5.1
unconnected-(U6-nFault-Pad4): U6.4
unconnected-(U8-nc-Pad5): U8.5
unconnected-(U8-PG-Pad2): U8.2
unconnected-(U18-nFLG-Pad3): U18.3
USB2_N: J11.A7 J11.B7 Module1.103 | length 71.9
  F.Cu w0.147: Module1.103@-43.92,-24.7 -36.183,-24.7 -30.447,-30.435 v1(-30.447,-30.647) ; v1(-20.3,-40.8) -20.083,-40.8 -14.8,-46.083 -14.8,-64.917 -20.95,-71.067 -20.95,-72.406 -21,-72.456 -21,-73 -21.25,-73.25 J11.B7@-21.25,-74.145 -21.25,-75.05 -21.1,-75.2 -20.4,-75.2 -20.25,-75.05 J11.A7@-20.25,-74.145
  B.Cu w0.147: v1(-30.447,-30.647) -30.235,-30.647 -20.3,-40.583 v1(-20.3,-40.8)
USB2_P: J11.A6 J11.B6 Module1.105 | length 73
  F.Cu w0.147: Module1.105@-43.92,-24.3 -43.179,-24.3 ; -43.179,-24.3 -36.017,-24.3 -30.165,-30.153 v1(-29.953,-30.153) ; J11.A6@-20.75,-74.145 -20.75,-73.35 -20.5,-73.1 ; v1(-19.8,-40.3) -19.8,-40.517 -14.4,-45.917 -14.4,-56.875 ccw(c-14.187,-56.875) -14.187,-57.087 ccw(c-14.187,-57.3) -13.975,-57.3 -13.975,-57.375 ccw(c-14.187,-57.375) -14.187,-57.587 ccw(c-14.187,-57.8) -14.4,-57.8 -14.4,-65.083 -20.55,-71.233 -20.55,-72.406 -20.5,-72.456 -20.5,-73.1 ; J11.B6@-19.75,-74.145 -19.75,-73.45 -20.1,-73.1 -20.5,-73.1
  B.Cu w0.147: v1(-29.953,-30.153) -29.953,-30.365 -20.017,-40.3 v1(-19.8,-40.3)
USB3-0-D_N: J12.A2 Module1.136 | length 88.8
  F.Cu w0.147: Module1.136@-47.04,-18.3 -48.183,-18.3 -52.5,-22.617 -52.5,-30.105 -47.105,-35.5 -41.983,-35.5 -39.149,-38.334 v1(-39.149,-38.549) ; J12.A2@-36.5,-69.75 -35.7,-70.55 -35.7,-71.583 -32.283,-75 -27.717,-75 -26.3,-73.583 -26.3,-71.083 -24.5,-69.283 -24.5,-60.217 -29.9,-54.817 -29.9,-48.283 -29.517,-47.9 -29.151,-47.9 v1(-29,-48.051)
  B.Cu w0.147: v1(-39.149,-38.549) -38.934,-38.549 -29.583,-47.9 -29.151,-47.9 v1(-29,-48.051)
USB3-0-D_P: J12.A3 Module1.134 | length 89.9
  F.Cu w0.147: Module1.134@-47.04,-18.7 -48.017,-18.7 -52.1,-22.783 -52.1,-29.939 -46.939,-35.1 -41.817,-35.1 -38.866,-38.051 v1(-38.651,-38.051) ; J12.A3@-34.5,-69.75 -35.3,-70.55 -35.3,-71.417 -33.509,-73.209 cw(c-33.332,-73.032) -33.155,-73.209 -32.801,-72.855 cw(c-32.625,-73.032) -32.448,-72.855 cw(c-32.625,-73.032) -32.448,-73.209 -32.801,-73.562 cw(c-32.625,-73.739) -32.801,-73.916 -32.117,-74.6 -27.883,-74.6 -26.7,-73.417 -26.7,-70.917 -24.9,-69.117 -24.9,-60.383 -30.3,-54.983 -30.3,-48.117 -29.683,-47.5 -29.151,-47.5 v1(-29,-47.348)
  B.Cu w0.147: v1(-38.651,-38.051) -38.651,-38.266 -29.417,-47.5 -29.151,-47.5 v1(-29,-47.348)
USB3-0-RX_N: J12.A6 Module1.128 | length 77.4
  F.Cu w0.147: Module1.128@-47.04,-19.9 -48.017,-19.9 -51,-22.883 -51,-28.868 -45.868,-34 -40.717,-34 -38.666,-36.051 v1(-38.451,-36.051) ; J12.A6@-33.5,-68.25 -33.4,-68.35 -33.4,-70.583 -32.683,-71.3 -31.417,-71.3 -29.417,-69.3 -26.717,-69.3 -25.8,-68.383 -25.8,-61.917 -26.764,-60.953 v1(-26.764,-60.739)
  B.Cu w0.147: v1(-38.451,-36.051) -38.451,-36.266 -26.9,-47.817 -26.9,-51.083 -27.5,-51.683 -27.5,-53.9 cw(c-27.376,-53.9) -27.376,-54.024 cw(c-27.376,-54.148) -27.252,-54.148 -27.252,-54.4 cw(c-27.376,-54.4) -27.376,-54.524 cw(c-27.376,-54.648) -27.5,-54.648 -27.5,-60.217 -26.978,-60.739 v1(-26.764,-60.739)
USB3-0-RX_P: J12.A5 Module1.130 | length 76.5
  F.Cu w0.147: Module1.130@-47.04,-19.5 -48.183,-19.5 -51.4,-22.717 -51.4,-29.034 -46.034,-34.4 -40.883,-34.4 -38.949,-36.334 v1(-38.949,-36.549) ; J12.A5@-31.5,-68.25 -31.75,-68.25 -33,-69.5 -33,-70.417 -32.517,-70.9 -31.583,-70.9 -29.6,-68.917 -29.6,-68.9 -26.883,-68.9 -26.2,-68.217 -26.2,-62.083 -27.047,-61.236 v1(-27.261,-61.236)
  B.Cu w0.147: v1(-38.949,-36.549) -38.734,-36.549 -27.3,-47.983 -27.3,-50.917 -27.9,-51.517 -27.9,-60.383 -27.261,-61.022 v1(-27.261,-61.236)
USB3-0-TX_N: J12.A9 Module1.140 | length 85
  F.Cu w0.147: Module1.140@-47.04,-17.5 -48.217,-17.5 -53.1,-22.383 -53.1,-30.9 -47.3,-36.7 -42.817,-36.7 -39.066,-40.451 v1(-38.851,-40.451)
  B.Cu w0.147: J12.A9@-39.233,-68.25 J12.A9@-39.5,-68.25 -39.225,-68.25 -38,-69.475 -38,-70.783 -37.083,-71.7 -31.817,-71.7 -29.317,-69.2 -27.717,-69.2 -25.8,-67.283 -25.8,-64.317 -30.9,-59.217 -30.9,-48.617 -38.851,-40.666 v1(-38.851,-40.451)
USB3-0-TX_P: J12.A8 Module1.142 | length 84.5
  F.Cu w0.147: Module1.142@-47.04,-17.1 -48.383,-17.1 -53.5,-22.217 -53.5,-31 -47.4,-37.1 -42.983,-37.1 -39.349,-40.734 v1(-39.349,-40.949)
  B.Cu w0.147: v1(-39.349,-40.949) -39.134,-40.949 -31.3,-48.783 -31.3,-59.383 -26.2,-64.483 -26.2,-67.117 -27.883,-68.8 -29.483,-68.8 -31.983,-71.3 -36.917,-71.3 -37.6,-70.617 -37.6,-69.309 -38.4,-68.509 -38.4,-68.3 -38.3,-68.2 J12.A8@-37.5,-68.2
USB3-1-D_N: J12.B2 Module1.165 | length 75
  F.Cu w0.127: Module1.165@-43.92,-12.3 -43.395,-12.3 -43.385,-12.31 -39.321,-12.31 -27.11,-24.521 -27.11,-32.679 -40.521,-46.09 -42.292,-46.09 v1(-42.453,-46.252)
  B.Cu w0.147: v1(-42.453,-46.252) -42.302,-46.1 -41.883,-46.1 -35.7,-52.283 -35.7,-63.5 -36.5,-64.3 J12.B2@-36.5,-66.55
USB3-1-D_P: J12.B3 Module1.163 | length 76.5
  F.Cu w0.127: Module1.163@-43.92,-12.7 -43.395,-12.7 -43.385,-12.69 -39.479,-12.69 -27.49,-24.679 -27.49,-32.521 -40.679,-45.71 -42.292,-45.71 v1(-42.453,-45.548)
  B.Cu w0.147: v1(-42.453,-45.548) -42.302,-45.7 -41.717,-45.7 -35.3,-52.117 -35.3,-56.7 ccw(c-35.05,-56.7) -35.05,-56.95 -35.037,-56.95 ccw(c-35.037,-57.2) -34.787,-57.2 ccw(c-35.037,-57.2) -35.037,-57.45 -35.05,-57.45 ccw(c-35.05,-57.7) -35.3,-57.7 -35.3,-63.5 -34.5,-64.3 J12.B3@-34.5,-66.55
USB3-1-RX_N: J12.B6 Module1.157 | length 72.3
  F.Cu w0.127: Module1.157@-43.96,-13.9 -43.589,-13.9 -43.579,-13.89 -42.979,-14.49 -39.279,-14.49 -28.49,-25.279 -28.49,-32.021 -38.879,-42.41 -40.379,-42.41 -40.72,-42.751 v1(-40.949,-42.751)
  B.Cu w0.147: v1(-40.949,-42.751) -40.949,-42.966 -41.3,-43.317 -41.3,-44.883 -32.7,-53.483 -32.7,-58.9 ccw(c-32.95,-58.9) -32.95,-59.15 -32.964,-59.15 ccw(c-32.964,-59.4) -33.214,-59.4 ccw(c-32.964,-59.4) -32.964,-59.65 -32.95,-59.65 ccw(c-32.95,-59.9) -32.7,-59.9 -32.7,-64.25 J12.B6@-33.5,-65.05
USB3-1-RX_P: J12.B5 Module1.159 | length 70.8
  F.Cu w0.127: Module1.159@-43.95,-13.51 -43.421,-13.51 -42.821,-14.11 -39.121,-14.11 -28.11,-25.121 -28.11,-32.179 -38.721,-42.79 -40.221,-42.79 -40.451,-43.02 v1(-40.451,-43.249)
  B.Cu w0.147: v1(-40.451,-43.249) -40.666,-43.249 -40.9,-43.483 -40.9,-44.717 -32.3,-53.317 -32.3,-64.3 J12.B5@-31.5,-65.1
USB3-1-TX_N: J12.B9 Module1.169 | length 75.1
  F.Cu w0.127: Module1.169@-43.95,-11.49 -43.487,-11.49 -43.223,-11.754 -39.015,-11.754 -26.39,-24.379 -26.39,-33.021 -41.079,-47.71 -41.827,-47.71 -42.163,-48.046 v1(-42.391,-48.046)
  B.Cu w0.147: v1(-42.391,-48.046) -42.391,-48.26 -42.9,-48.769 -42.9,-50.883 -38.675,-55.108 -38.675,-60.416 ccw(c-38.917,-60.416) -38.917,-60.658 ccw(c-38.917,-60.9) -39.159,-60.9 -39.159,-60.916 ccw(c-38.917,-60.916) -38.917,-61.158 ccw(c-38.917,-61.4) -38.675,-61.4 -38.675,-64.175 J12.B9@-39.5,-65
USB3-1-TX_P: J12.B8 Module1.171 | length 73.6
  F.Cu w0.127: Module1.171@-43.96,-11.1 -43.67,-11.1 -43.66,-11.11 -43.329,-11.11 -43.066,-11.374 -38.858,-11.374 -26.01,-24.221 -26.01,-33.179 -40.921,-48.09 -41.67,-48.09 -41.894,-48.314 v1(-41.894,-48.543)
  B.Cu w0.147: v1(-41.894,-48.543) -42.108,-48.543 -42.5,-48.935 -42.5,-50.717 -38.275,-54.942 -38.275,-64.225 J12.B8@-37.5,-65
USBOTG: J2.10 Module1.101 | length 85
  F.Cu w0.13: J2.10@-58.34,7.74 -57.1,6.5 -57.1,3.8 -55.7,2.4 -37.7,2.4 v1(-37.15,1.85)
  F.Cu w0.147: Module1.101@-43.92,-25.1 -43.5,-25.1 -43.3,-25.3 -37.6,-25.3 -30.9,-32 -30.2,-32 -29.1,-30.9 -29.1,-25.6 v1(-36.8,-17.9)
  B.Cu w0.13: v1(-37.15,1.85) -30.1,-5.2
  B.Cu w0.147: v1(-36.8,-17.9) -30.1,-11.2 -30.1,-5.2
VBAT: BT1.1 Module1.76 | length 154.8
  F.Cu w0.13: BT1.1@-117.5,-54.985 -111.885,-54.985 -106.15,-49.25 -106.15,-36.4 -107.7,-34.85 ; BT1.1@-117.5,-31.815 -111.585,-31.815 -108.55,-34.85 -107.7,-34.85 ; v1(-100.7,-20.1) -106.2,-25.6 -106.2,-33.5 -107.55,-34.85 -107.7,-34.85 ; v1(-93.5,-13.8) -87.5,-7.8 -64.7,-7.8 -61.3,-4.4 -46,-4.4 -45.86,-4.26 -40.74,-4.26 -40.6,-4.4 -35.3,-4.4 -35.18,-4.28 -30.72,-4.28 -30.6,-4.4 -30.2,-4.4 -24.3,-10.3 Module1.76@-13.08,-10.3
  B.Cu w0.13: v1(-100.7,-20.1) -99,-20.1 -93.5,-14.6 v1(-93.5,-13.8)
VBUS: C3.1 C7.1 C8.1 J12.A1 J12.B1 U6.6 | length 80.6
  F.Cu w0.23: -38.5,-64.4 -38.5,-66.05 J12.B1@-39,-66.55 ; J12.B1@-39,-66.55 -39.35,-66.55 -40.65,-67.85 -40.65,-68.875 -39.925,-69.6 -39.15,-69.6 J12.A1@-39,-69.75 -38.55,-69.3 -38.55,-67 J12.B1@-39,-66.55
  F.Cu w0.5: v1(-39.4,-63.3) C7.1@-38.3,-62.2 ; -38.5,-64.4 -38.3,-64.2 C7.1@-38.3,-62.2 ; C8.1@-38.3,-59.8 C7.1@-38.3,-62.2 ; U6.6@-19.05,-54.7 -18.3,-54.7
  F.Cu w1: C3.1@-21.6,-65.5 v1(-20.6,-66.5) v1(-22.7,-66.5) C3.1@-21.6,-65.4
  F.Cu w2: C3.1@-21.6,-65 -18.3,-61.7 -18.3,-54.7
  In2.Cu w0.23: v1(-39.4,-63.3) -40.3,-64.2 -40.3,-65.5 -39.25,-66.55 J12.B1@-39,-66.55
  B.Cu w0.23: J12.A1@-39,-69.95 -39.775,-69.95 -40.675,-69.05 -40.675,-68.225 J12.B1@-39,-66.55
  B.Cu w1: J12.A1@-39,-69.95 -39.25,-70.2 -39.25,-73.275 -37.125,-75.4 -28.4,-75.4 -23.1,-70.1 ; v1(-22.7,-66.5) -23.1,-66.9 -23.1,-70.1 ; -23.1,-70.1 -20.6,-67.6 v1(-20.6,-66.5) v1(-21.5,-66.5) -23.1,-68.1 -23.1,-70.1
VBUS_EN: Module1.111 U6.3 | length 44.8
  F.Cu w0.13: Module1.111@-43.96,-23.1 -43.5,-23.1 -43,-23.6 -34.9,-23.6 v1(-29.6,-28.9) ; U6.3@-20.95,-52.425 -21.6,-51.775 -21.6,-39.6 v1(-20.5,-38.5)
  B.Cu w0.13: v1(-29.6,-28.9) -20.5,-38 v1(-20.5,-38.5)
WL_nDis: J3.1 Module1.89 | length 19.6
  F.Cu w0.13: Module1.89@-10,-7.5 -8.7,-7.5 0,1.2 J3.1@0,7.2
pads on no net: H1.Un1 H2.Un1 H3.Un1 H4.Un1 H5.Un1 H6.Un1 H7.Un1 H8.Un1 J4.Un1 J4.Un2 J5.MP J11.Un1 J11.Un2 J14.MP J16.MP Module1.Un1 Module1.Un2 Module1.Un3 Module1.Un4 SW1.Un1 SW1.Un2 U3.Un1 U3.Un2 U8.Un1 U8.Un2

## Polygon pours and split planes (outlines as drawn)
GND on F.Cu "F.Cu-GND" (solid, remove dead copper, pour order 8): -15.5,3.2 -15.5,9.2 28,9.2 31,6.2 31,-76.8 28,-79.8 -125,-79.8 -128,-76.8 -128,-13.05 -128,-1.925 -128,6.2 -125,9.2 -31.5,9.2 -31.5,3.2
M2_3v3 on F.Cu "F.Cu-/PCIe-M2/M2_3v3-1" (solid, remove dead copper, pour order 3): 28.3,-70.6 23.8,-70.6 23.8,-69.5 23.2,-68.9 17.4,-68.9 14.6,-68.9 14.6,-60.9 24.2,-60.9 28.3,-65
+5v on F.Cu "F.Cu-/+5v" (solid, remove dead copper, pour order 7): -5.5,-55.2 -5,-55.7 -3.8,-55.7 -2.9,-54.8 -2.9,-48.7 0.2,-45.6 0.1,-10.9 -3,-7.8 -9.9,-7.8 -9.9,-10 -9.1,-10 -5.5,-13.6
M2_3v3 on F.Cu "F.Cu-/PCIe-M2/M2_3v3" (solid, remove dead copper, pour order 2): 5.6,-55.5 5.6,-63.9 4.5,-65.2 4.5,-66 6.1,-66 9.7,-69.6 9.7,-71.2 11.2,-71.2 11.2,-69.3 11.6,-68.9 14.6,-68.9 14.6,-67.7 14.6,-55.5
GND on In1.Cu "In1.Cu-GND" (solid, remove dead copper, pour order 9): -31.5,9.182 -31.5,3.218 -15.5,3.2 -15.5,9.159 28,9.2 31,6.2 31,-76.8 28,-79.8 4,-79.8 -125,-79.8 -128,-76.8 -128,-13.05 -128,-1.925 -128,6.2 -125,9.2
GND on In2.Cu "In2.Cu-GND" (solid, remove dead copper, pour order 10): -15.5,3.2 -15.5,9.2 11.5,9.2 28,9.2 31,6.2 31,-76.8 28,-79.8 4,-79.8 -125,-79.8 -128,-76.8 -128,6.2 -125,9.2 -31.5,9.2 -31.5,3.2
VBUS on B.Cu "B.Cu-/CM5_HighSpeed/VBUS" (solid, remove dead copper, pour order 6): -38.4,-66.1 -39.9,-66.1 -41.2,-67.4 -41.2,-69.7 -40.2,-70.7 -40.2,-76.5 -39.5,-77.2 -27.6,-77.2 -25.4,-75 -25.4,-73.9 -20.1,-68.6 -20.1,-65.9 -24.6,-65.9 -25.1,-66.4 -25,-67.5 -27,-69.5 -29.9,-72.5 -36.9,-72.5 -38.4,-71 -38.4,-67.2
+5v on B.Cu "B.Cu-/+5v" (solid, remove dead copper, pour order 5): -23.6,-73.6 -17.7,-73.6 -14.6,-70.5 -14.6,-66.5 -2.9,-54.8 -2.9,-50.6 -18.9,-50.6 -18.9,-64.7 -19.3,-65.1 -19.3,-66.5 -20.2,-67.4 -20.2,-69.5 -22,-71.3 -22.8,-71.3 -23.6,-72.1
GND on B.Cu "B.Cu-GND" (solid, remove dead copper, pour order 11): 31,6.2 31,-76.8 28,-79.8 -125,-79.8 -128,-76.8 -128,6.2 -125,9.2 -31.5,9.2 -31.5,3.2 -15.5,3.2 -15.5,9.2 28,9.2

## Keep-outs
Edge.Cuts:
  lines w0: -128.5,-76.8 ccw(c-125,-76.8) -125,-80.3 28,-80.3 ccw(c28,-76.8) 31.5,-76.8 31.5,6.2 ccw(c28,6.2) 28,9.7 -125,9.7 ccw(c-125,6.2) -128.5,6.2 -128.5,-76.8
  lines w0.254: -128.5,-76.8 ccw(c-125,-76.8) -125,-80.3 28,-80.3 ccw(c28,-76.8) 31.5,-76.8 31.5,6.2 ccw(c28,6.2) 28,9.7 -125,9.7 ccw(c-125,6.2) -128.5,6.2 -128.5,-76.8

## Other copper
F.Cu:
  text "Board thickness  : 1.6mm / Finished copper weight inners : 24.9um or greater / Finished copper weight outers : 35um or greater /  / Board finish : OSP / Material type : FR4 / Colour of solder resists : Green / Colour of silk screens : White Only on the top side / Board to : UL94-V0 / TG >=130 /  / 50R trace width 0.13mm@ 3GHz / 90R diff pair width 0.147 spacing 0.253mm @ 2.5GHz / 100R diff pair width 0.127 spacing 0.253mm @ 2GHz" at -68.326,10.668 h1.5

## Silkscreen, mask and mechanical layers (free items; w line width, h text height)
F.SilkS:
  lines w0.254: -71.4,-2.7 -69,-2.7 -68.5,-2.7 -68.5,-1.3 ; -68.9,-1.7 -68.5,-1.3 ; -68.1,-1.7 -68.5,-1.3 ; -66.4,-4.8 -66,-4.8 -66,-1.3 ; -66.4,-1.7 -66,-1.3 ; -65.6,-1.7 -66,-1.3 ; -15.3,-1.8 -13.8,-1.8 ; -15.3,0.6 -13.8,0.6 ; -14.2,-2.2 -13.8,-1.8 ; -14.2,0.2 -13.8,0.6 ; -14.2,1 -13.8,0.6 ; -121.6,-65.2 -121.6,-58.2 ; -121.6,-65.2 -121.6,-58.2 ; -121.6,-65.2 -114.6,-65.2 -114.6,-59.2 -114.6,-58.2 -121.6,-58.2 ; -13.8,-1.8 -14.2,-1.4 -13.8,-1.8 ; -87.5,-18.8 -86.7,-18.8 -86.7,-14.8 -87.5,-14.8 -87.5,-18.8 ; -85,-18.8 -84.2,-18.8 -84.2,-14.8 -85,-14.8 -85,-18.8 ; -68.9,-0.7 -68.1,-0.7 -68.1,3.3 -68.9,3.3 -68.9,-0.7 ; -66.4,-0.7 -65.6,-0.7 -65.6,3.3 -66.4,3.3 -66.4,-0.7
  text "J3 : nBT_Dis GND" at -39.615,7.06 h1
  text "nWireless_Dis" at -25.297,7.06 h1
  text "J5" at -108.25,4.75 h1
  text "J16" at -92.45,4.55 h1
  text "USB_OTG" at -64.817,3.25 h1 r270
  text "PMIC_Enable" at -57.217,3.25 h1 r270
  text "SYNC_Out" at -58.083,2.95 h1 r90
  text "PWR_Button" at -53.083,2.95 h1 r90
  text "FAN" at -4.347,1.25 h1
  text "CAM/DISP 1" at -85.087,0.079 h1
  text "CAM/DISP 0" at -121.402,-0.021 h1
  text "Power Button" at -104.15,-0.05 h1
  text "Fit for 1.8V GPIO" at -27.973,-0.074 h1
  text "Fit for 3.3V GPIO" at -28.077,-2.474 h1
  text "Fit jumper to disable eMMC Boot" at -98.15,-3.54 h1
  text "Fit jumper to disable writing to EEPROM" at -98.15,-5.74 h1
  text "Fit two jumpers  / for CAM/DISP 1" at -83.6,-18.592 h1
  text "Raspberry Pi HAT" at -116.278,-24.581 h2
  text "Compute Module 5" at -41.716,-29.233 h2
  text "Compute Module 5 IO Board" at -68.55,-51.983 h2
  text "Ethernet" at -60.004,-55.4 h2
  text "Battery / CR2032" at -127.661,-57.496 h1
  text "NB SD card / only used for  / CM5 modules  / without eMMC" at -17.9,-60.18 h1
  text "SD card" at -17.432,-63.1 h2
  text "USB3" at -35.49,-63.5 h2
  text "POE" at -68.402,-65.55 h1
  text "M.2 M Key" at 14.9,-67.367 h1
  text "HDMI1" at -84.078,-68.05 h2
  text "HDMI0" at -109.556,-68.25 h2
  text "Power In" at -25.7,-69.75 h1.5
  text "USB Device" at -24.371,-70.574 h1
  text "Rev 1" at -108.174,-76.55 h1.5
  text "Made in PRC" at -43.826,-79.95 h1 r90
Dwgs.User:
  lines w0.254: -141.7,-12.8 -129,-12.8

## Dimensions
-80.5,-89.3 to -105.5,-89.3 on Dwgs.User
-94.8,-79.2 to -91.15,-79.2 on Dwgs.User
-128.5,4.7 to -117,4.7 on Dwgs.User
-35.5,-77.7 to -20.5,-77.7 on Dwgs.User
-94.8,-79.45 to -91.15,-79.45 on Dwgs.User
-128.5,-76.8 to -67,-76.8 on Dwgs.User
-54.5,-89.3 to -80.5,-89.3 on Dwgs.User
-117.5,-80.3 to -117.5,-3.3 on Dwgs.User
31.5,-80.3 to -128.5,-80.3 on Dwgs.User
-132.5,-80.3 to -132.5,-76.8 on Dwgs.User
-141.2,-80.3 to -141.2,-12.8 on Dwgs.User
-117.5,-79.95 to -94.8,-79.95 on Dwgs.User
4,-79.2 to -7.25,-79.2 on Dwgs.User
-125,-87.3 to -105.5,-87.3 on Dwgs.User
-132.5,9.7 to -132.5,-80.3 on Dwgs.User
-125,-89.3 to -128.5,-89.3 on Dwgs.User
-117.5,-79.2 to -94.8,-79.2 on Dwgs.User
-117,11.7 to -99,11.7 on Dwgs.User
-20.5,-85.3 to -7.25,-85.3 on Dwgs.User
-54.5,-83.8 to -35.5,-83.8 on Dwgs.User
-137,-80.3 to -137,-27.8 on Dwgs.User
-117.5,-80.3 to -117.5,-72.3 on Dwgs.User
-117,9.3 to -81,9.3 on Dwgs.User
-128.5,-3.3 to -117.5,-3.3 on Dwgs.User